# Altium PCB Ultrasonic_Localisation_new.PcbDoc
Units mil, origin at the board's own origin, x right, y up, seen from the top; angles counter-clockwise.
Board outline 6000 x 4000 mil, 2 copper layers (Top Layer, Bottom Layer); 42 components, 37 nets, 231 pads, 0 vias.
Unrouted connection lines stored in the file: 101.
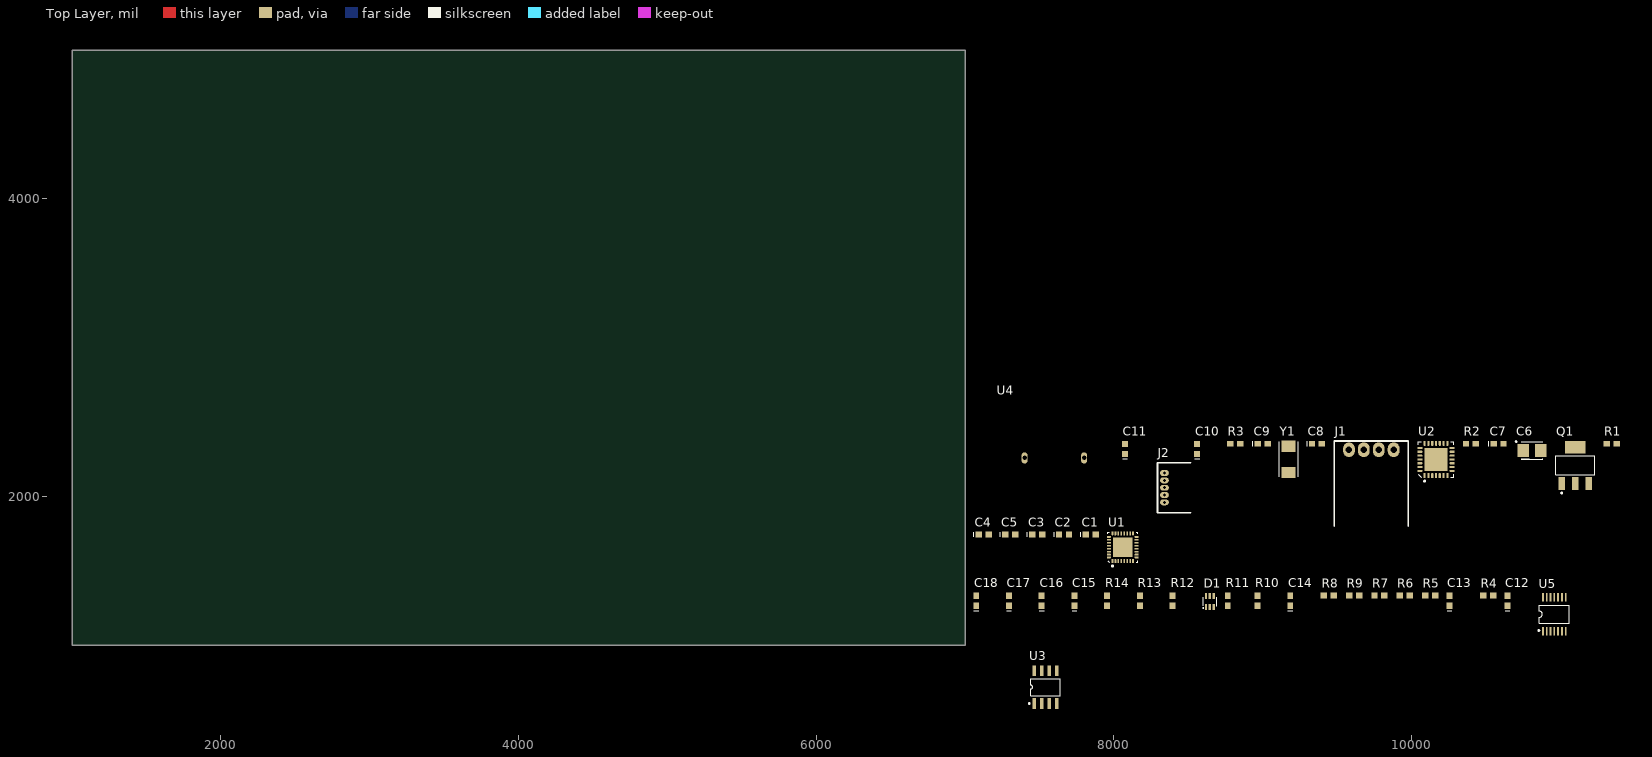
[diagram p0: Top Layer view]
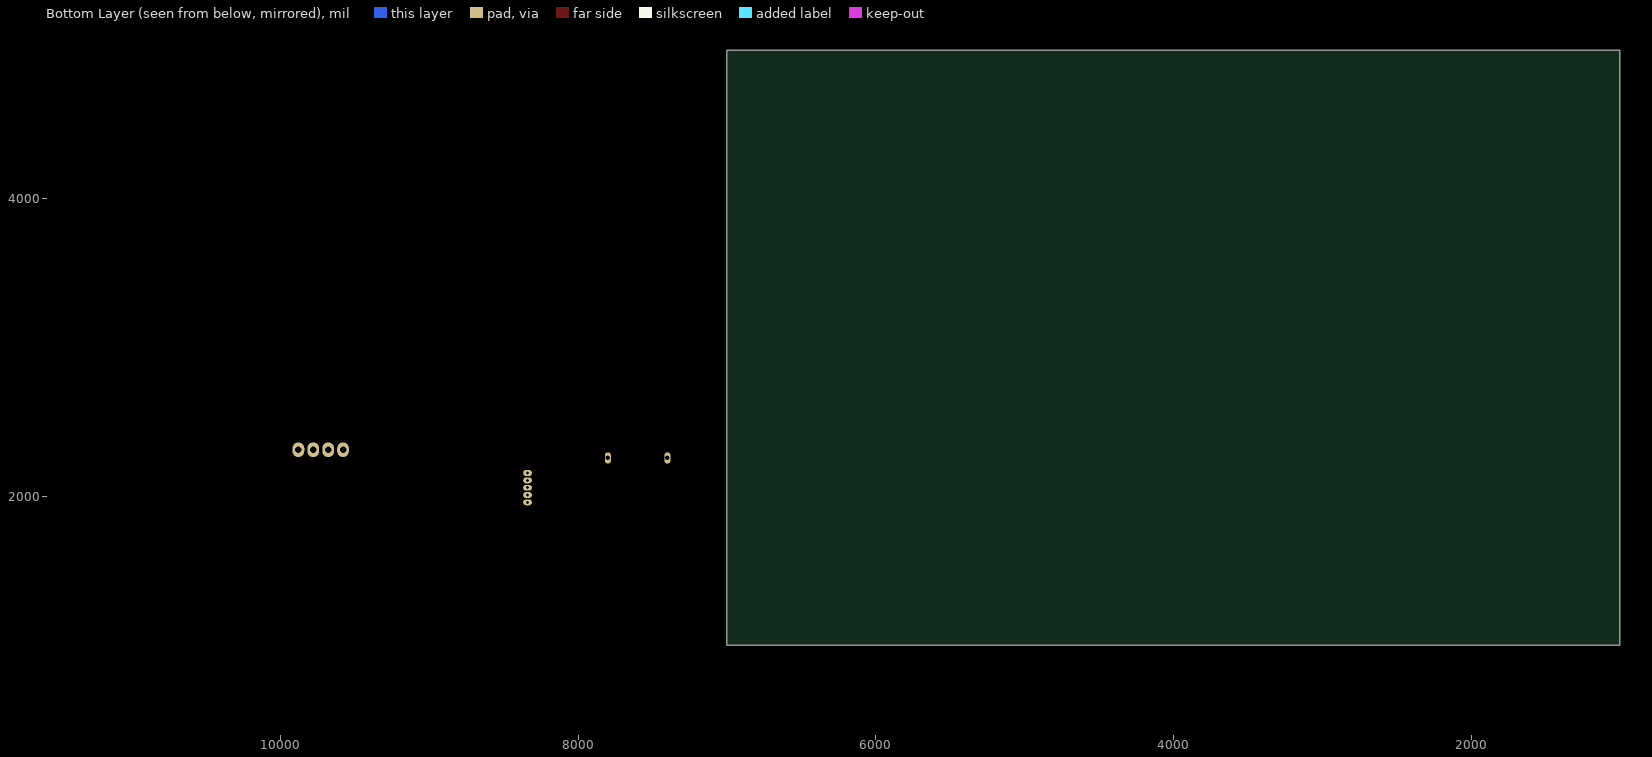
[diagram p1: Bottom Layer view, seen from below]

## Layer stack, top to bottom
Top Layer: signal copper 1.4
Dielectric: dielectric 12.6, FR-4, Dk 4.8
Bottom Layer: signal copper 1.4

## Board outline
1000,1000 7000,1000 7000,5000 1000,5000

## Design rules (kind name [scope] priority, off if disabled: settings)
Clearance [All] p1: gap=6
ComponentClearance [All] p1: gap=10 collisioncheckmode=3 verticalgap=10
PolygonConnect [All] p1: connectstyle=Relief reliefconductorwidth=10 reliefentries=4 polygonreliefangle="90 Angle"
RoutingVias [All] p1: holewidth=28 width=50 viastyle="Through Hole" minholewidth=28 minwidth=50 maxholewidth=28 maxwidth=50
SolderMaskExpansion [All] p1: expansion=4
TestPointUsage [All] p1: valid=0 allowmultiple=FALSE
Testpoint [All] p1: side=15 testpointundercomponent=TRUE minsize=40 maxsize=100 preferedsize=60 minholesize=0 maxholesize=40 preferedholesize=32 testpointgrid=1 style=1023 order=0123456789
Width [All] p1: maxlimit=10 minlimit=10 preferedwidth=10
18 further rules are at their usual default settings.

## Classes and differential pairs
component class S1: C12 C13 C14 C15 C16 C17 C18 D1 R4 R5 R6 R7 R8 R9 R10 R11 R12 R13 R14 U5
component class S2: C1 C2 C3 C4 C5 U1
component class Ultrasonic_Localisation: C6 C7 C8 C9 C10 C11 J1 J2 Q1 R1 R2 R3 U2 U3 U4 Y1

## Components (designator, comment, footprint, x,y, rotation, side; value= is the part's Value field where it differs from the comment)
C1 "UMK107BJ104KA-T" CC1608-0603 7845,1745 r0 top
C2 "UMK107BJ104KA-T" CC1608-0603 7665,1745 r0 top
C3 "UMK107BJ104KA-T" CC1608-0603 7485,1745 r0 top
C4 "UMK107BJ104KA-T" CC1608-0603 7125,1745 r0 top
C5 "UMK107BJ104KA-T" CC1608-0603 7305,1745 r0 top
C6 "TPSB106K016R0800" TC3528-1411 10810,2310 r0 top
C7 "UMK107BJ104KA-T" CC1608-0603 10585,2355 r0 top
C8 "Cap" CC1608-0603 9365,2355 r0 top
C9 "Cap" CC1608-0603 9000,2355 r0 top
C10 "UMK107BJ104KA-T" CC1608-0603 8560,2320 r90 top
C11 "UMK107BJ104KA-T" CC1608-0603 8075,2320 r90 top
C12 "Cap" CC1608-0603 10645,1300 r90 top
C13 "Cap" CC1608-0603 10255,1300 r90 top
C14 "Cap" CC1608-0603 9185,1300 r90 top
C15 "Cap" CC1608-0603 7735,1300 r90 top
C16 "Cap" CC1608-0603 7515,1300 r90 top
C17 "Cap" CC1608-0603 7295,1300 r90 top
C18 "Cap" CC1608-0603 7075,1300 r90 top
D1 "BAV99DW-7-F" SOT-323-6L 8645,1295 r0 top
J1 "70553-0003" CON_CAN_Device-4 9730,2315 r0 top
J2 "53048-0510" CON_ISP_H 8340,2060 r90 top
Q1 "MIC5201-5.0YS" DSO-G3 11100,2210 r0 top
R1 "Res" CR1608-0603 11345,2355 r0 top
R2 "Res" CR1608-0603 10400,2355 r0 top
R3 "Res" CR1608-0603 8815,2355 r0 top
R4 "Res" CR1608-0603 10515,1335 r0 top
R5 "Res" CR1608-0603 10125,1335 r0 top
R6 "Res" CR1608-0603 9955,1335 r0 top
R7 "Res" CR1608-0603 9785,1335 r0 top
R8 "Res" CR1608-0603 9445,1335 r0 top
R9 "Res" CR1608-0603 9615,1335 r0 top
R10 "Res" CR1608-0603 8965,1300 r90 top
R11 "Res" CR1608-0603 8765,1300 r90 top
R12 "Res" CR1608-0603 8395,1300 r90 top
R13 "Res" CR1608-0603 8175,1300 r90 top
R14 "Res" CR1608-0603 7955,1300 r90 top
U1 "p" QFN5X5-32 8060,1660 r0 top
U2 "PIC18F2580-I/ML" QFN6X6-28 10165,2250 r0 top
U3 "TJA1040TD-T" SO-G8/E2.9 7540,720 r0 top
U4 "MAXBOTIX_SENSOR" "Maxbotix Sensor" 7600,2260 r0 top
U5 "LMV324IPWR" TSSO5x6-G14/X.3 10960,1210 r0 top
Y1 "CS10-16.000MABJ-UT" CS10 9175,2250 r90 top

## Footprints (in the part's own frame and the unit in brackets; to place one, negate y for a bottom-side part, rotate by r counter-clockwise, add the part's x,y. Pads: shape width x height; smd on the part's side, far side on the other; paste and mask are expansions set on the pad)
CC1608-0603 [mm] "Chip Capacitor; Body 1.6 x 0.8 mm (LxW typ)"
  rect 1.1x1 smd: 1(-0.85,0) 2(0.85,0)
  silkscreen extent -1.7,-0.4 -1.7,0.4
CON_CAN_Device-4 [mm] "4-pin CAN connector - device side"
  oval 2x2.5 hole 1.1: 1(-3.81,0) 2(-1.27,0) 3(1.27,0) 4(3.81,0)
  silkscreen extent -6.33,-13 6.33,1.5
CON_ISP_H [mm] "Microchip ISP Connector horizontal"
  oval 1x1.5 hole 0.5: 1(-2.5,0) 2(-1.25,0) 3(0,0) 4(1.25,0) 5(2.5,0)
  silkscreen extent -4.28,-4.45 4.28,1.2
CR1608-0603 [mm] "Chip Resistor; Body 1.6 x 0.8 mm (LxW typ)"
  rect 1.1x1 smd: 1(-0.85,0) 2(0.85,0)
CS10 [mm] "Crystal"
  rect 1.9x2.4 smd: 1(-2.25,0) 2(2.25,0)
  silkscreen extent -3,-1.65 3,1.65
DSO-G3 [mm] "SOT-223/SC-73; 4 Leads; Body 6.7 x 7.3 mm, inc. leads (LxW max)"
  rect 1.1x2.15 smd: 1(-2.3,-3.1) 2(0,-3.1) 3(2.3,-3.1)
  rect 3.5x2.15 smd: 4(0,3.1)
  silkscreen extent -3.35,-4.85 3.35,1.63
"Maxbotix Sensor" [mil] "Maxbotix Ultrasonic Sensor"
  oval 40x75 hole 30: 1(-200,0) 2(200,0)
QFN5X5-32 [mm] "Quad Flat No Lead; 32 Terminals; Body 5 x 5 mm; Pitch 0.5 mm"
  rect 0.28x0.28 smd: 1(-1.75,-2.515) 2(-1.25,-2.515) 3(-0.75,-2.515) 4(-0.25,-2.515) 5(0.25,-2.515) 6(0.75,-2.515) 7(1.25,-2.515) 8(1.75,-2.515) 9(2.515,-1.75) 10(2.515,-1.25) 11(2.515,-0.75) 12(2.515,-0.25) 13(2.515,0.25) 14(2.515,0.75) 15(2.515,1.25) 16(2.515,1.75) 17(1.75,2.515) 18(1.25,2.515) 19(0.75,2.515) 20(0.25,2.515) 21(-0.25,2.515) 22(-0.75,2.515) 23(-1.25,2.515) 24(-1.75,2.515) 25(-2.515,1.75) 26(-2.515,1.25) 27(-2.515,0.75) 28(-2.515,0.25) 29(-2.515,-0.25) 30(-2.515,-0.75) 31(-2.515,-1.25) 32(-2.515,-1.75)
  oval 0.28x0.66 smd: 1(-1.75,-2.325) 2(-1.25,-2.325) 3(-0.75,-2.325) 4(-0.25,-2.325) 5(0.25,-2.325) 6(0.75,-2.325) 7(1.25,-2.325) 8(1.75,-2.325) 17(1.75,2.325) 18(1.25,2.325) 19(0.75,2.325) 20(0.25,2.325) 21(-0.25,2.325) 22(-0.75,2.325) 23(-1.25,2.325) 24(-1.75,2.325)
  oval 0.66x0.28 smd: 9(2.325,-1.75) 10(2.325,-1.25) 11(2.325,-0.75) 12(2.325,-0.25) 13(2.325,0.25) 14(2.325,0.75) 15(2.325,1.25) 16(2.325,1.75) 25(-2.325,1.75) 26(-2.325,1.25) 27(-2.325,0.75) 28(-2.325,0.25) 29(-2.325,-0.25) 30(-2.325,-0.75) 31(-2.325,-1.25) 32(-2.325,-1.75)
  rect 3.3x3.3 smd: 33(0,0)
  silkscreen extent -2.55,-3.33 2.55,2.55
QFN6X6-28 [mm] "Quad Flat No Lead, Plastic, Punch; 28 Terminals; Body 6 x 6 mm; Pitch 0.65 mm"
  rect 0.37x0.37 smd: 1(-1.95,-2.97) 2(-1.3,-2.97) 3(-0.65,-2.97) 4(0,-2.97) 5(0.65,-2.97) 6(1.3,-2.97) 7(1.95,-2.97) 8(2.97,-1.95) 9(2.97,-1.3) 10(2.97,-0.65) 11(2.97,0) 12(2.97,0.65) 13(2.97,1.3) 14(2.97,1.95) 15(1.95,2.97) 16(1.3,2.97) 17(0.65,2.97) 18(0,2.97) 19(-0.65,2.97) 20(-1.3,2.97) 21(-1.95,2.97) 22(-2.97,1.95) 23(-2.97,1.3) 24(-2.97,0.65) 25(-2.97,0) 26(-2.97,-0.65) 27(-2.97,-1.3) 28(-2.97,-1.95)
  oval 0.37x0.86 smd: 1(-1.95,-2.725) 2(-1.3,-2.725) 3(-0.65,-2.725) 4(0,-2.725) 5(0.65,-2.725) 6(1.3,-2.725) 7(1.95,-2.725) 15(1.95,2.725) 16(1.3,2.725) 17(0.65,2.725) 18(0,2.725) 19(-0.65,2.725) 20(-1.3,2.725) 21(-1.95,2.725)
  oval 0.86x0.37 smd: 8(2.725,-1.95) 9(2.725,-1.3) 10(2.725,-0.65) 11(2.725,0) 12(2.725,0.65) 13(2.725,1.3) 14(2.725,1.95) 22(-2.725,1.95) 23(-2.725,1.3) 24(-2.725,0.65) 25(-2.725,0) 26(-2.725,-0.65) 27(-2.725,-1.3) 28(-2.725,-1.95)
  rect 3.9x3.9 smd: 29(0,0)
  silkscreen extent -3.05,-3.83 3.05,3.05
SO-G8/E2.9 [mm] "Small Outline; 8 Leads; Body Width 3.9 mm; Pitch 1.27 mm"
  rect 0.6x1.85 smd: 1(-1.905,-2.775) 2(-0.635,-2.775) 3(0.635,-2.775) 4(1.905,-2.775) 5(1.905,2.775) 6(0.635,2.775) 7(-0.635,2.775) 8(-1.905,2.775)
  silkscreen extent -2.88,-2.9 2.5,1.45
SOT-323-6L [mm] "SOT-323-6L"
  rect 0.4x1.05 smd: 1(-0.65,-0.95) 2(0,-0.95) 3(0.65,-0.95) 4(0.65,0.95) 5(0,0.95) 6(-0.65,0.95)
  silkscreen extent -1.17,-1.15 1.15,0.7
TC3528-1411 [mm] "Capacitor, SM Tantalum; Body 3.5 x 2.8 mm (LxW typ)"
  rect 2x2.2 smd: 1(-1.5,0) 2(1.5,0)
  silkscreen extent -2.82,-1.5 1.85,1.62
TSSO5x6-G14/X.3 [mm] "Shrink Small Outline; 14 Leads; Body Width 4.4 mm; Pitch 0.65 mm"
  rect 0.3x1.45 smd: 1(-1.95,-2.875) 2(-1.3,-2.875) 3(-0.65,-2.875) 4(0,-2.875) 5(0.65,-2.875) 6(1.3,-2.875) 7(1.95,-2.875) 8(1.95,2.875) 9(1.3,2.875) 10(0.65,2.875) 11(0,2.875) 12(-0.65,2.875) 13(-1.3,2.875) 14(-1.95,2.875)
  silkscreen extent -2.77,-2.9 2.55,1.55

## Part data
C1 C2 C3 C4 C5 C7 C10 C11: library part Cap, "Capacitor"
C6: library part "Cap Pol", "Polarized Capacitor (Surface Mount)"
C8 C9 C12 C13 C14 C15 C16 C17 C18: "Capacitor"
D1: library part BAV99DW, "Quad surface mount switching diode array"
J1: library part CON_CAN_DEVICE, "4 pin CAN Connector 2.54mm pitch"
J2: library part CON_ISP_Header_5p_1.25mm_horizontal, "6 pin header - 1.25mm pitch horizontal"
Q1: "5V LDO 200mA"
R1 R2 R3 R4 R5 R6 R7 R8 R9 R10 R11 R12 R13 R14: "Resistor"
U1: library part MAX3243E_SMALL, "RS232 Transceiver"
U2: "8 bit CAN MCU"
U3: "5V CAN Transceiver"
U4: "Maxbotix Ultrasonic Sensor"
U5: "Rail-to-Rail Operational Amplifier"
Y1: library part CS10, "Crystal Oscillator"

## Nets (pads, with @x,y where several pads share a name; then routed paths per layer and width w, separated by ;. In a path a pad name is that pad's centre, name@x,y a point inside that pad or via, vN(x,y) a via of type N, cw(c..) or ccw(c..) an arc to the next point about the centre after c; other vN are vias at no path point)
C\A\N\_\E\N\: U2.3 U3.8
CAN_RX: U2.21 U3.4
CAN_TX: U2.20 U3.1
CANH/UART_TX: J1.2 U1.6 U3.7
CANL/UART_RX: J1.3 U1.1 U3.6
GND: C3.2 C4.2 C5.2 C6.2 C7.2 C8.1 C9.1 C10.2 C11.2 C13.1 C14.1 C15.1 C17.1 C18.1 J1.4 J2.5 Q1.2 Q1.4 R10.1 U1.24 U1.33 U2.5 U2.16 U2.29 U3.2 U5.11
M\C\L\R\: J2.2 R2.1 U2.26
NetC1_1: C1.1 U1.28
NetC1_2: C1.2 U1.23
NetC2_1: C2.1 U1.29
NetC2_2: C2.2 U1.30
NetC4_1: C4.1 U1.31
NetC5_1: C5.1 U1.27
NetC7_1: C7.1 J1.1 Q1.1 R1.2
NetC8_2: C8.2 U2.6 Y1.1
NetC9_2: C9.2 R3.2 Y1.2
NetC12_1: C12.1 R4.2 R7.1
NetC12_2: C12.2 U2.13 U4.1
NetC14_2: C14.2 R5.1 R7.2 R10.2 U5.10
NetC15_2: C15.2 R6.1 R9.2
NetC16_2: C16.2 R9.1 R13.2 U5.9
NetC17_2: C17.2 R14.2
NetC18_2: C18.2 R12.1
NetD1_1: D1.1 D1.2 D1.5 R8.1 U5.1 U5.5
NetD1_3: D1.3 D1.4 R11.1 R12.2 U5.6
NetD1_6: D1.6 R8.2 R14.1 U5.2
NetR3_1: R3.1 U2.7
NetR4_1: R4.1 U5.3
NetR11_2: R11.2 U5.7
NetU2_12: U2.12 U4.2
PGC: J2.4 U2.24
PGD: J2.3 U2.25
SNSR_OP: C16.1 R13.1 U2.27 U5.8
U\A\R\T\_\E\N\: U1.21 U2.4
USART/RX: U1.18 U2.15
USART/TX: U1.12 U2.14
VCC5V: C3.1 C6.1 C10.1 C11.1 C13.2 J2.1 Q1.3 R1.1 R2.2 R5.2 R6.2 U1.22 U1.26 U2.17 U3.3 U5.4
pads on no net: U1.2 U1.3 U1.4 U1.5 U1.7 U1.8 U1.9 U1.10 U1.11 U1.13 U1.14 U1.15 U1.16 U1.17 U1.19 U1.20 U1.25 U1.32 U2.1 U2.2 U2.8 U2.9 U2.10 U2.11 U2.18 U2.19 U2.22 U2.23 U2.28 U3.5 U5.12 U5.13 U5.14